# Altium PCB 10515.0502_CVSP1_2020（2拼版）2020.1019.PcbDoc (part 1 of 3)
Units mm, origin at the board's own origin, x right, y up, seen from the top; angles counter-clockwise.
Board outline 162.18 x 163.99 mm, 2 copper layers (Top Layer, Bottom Layer); 124 components, 0 nets, 386 pads, 70 vias.
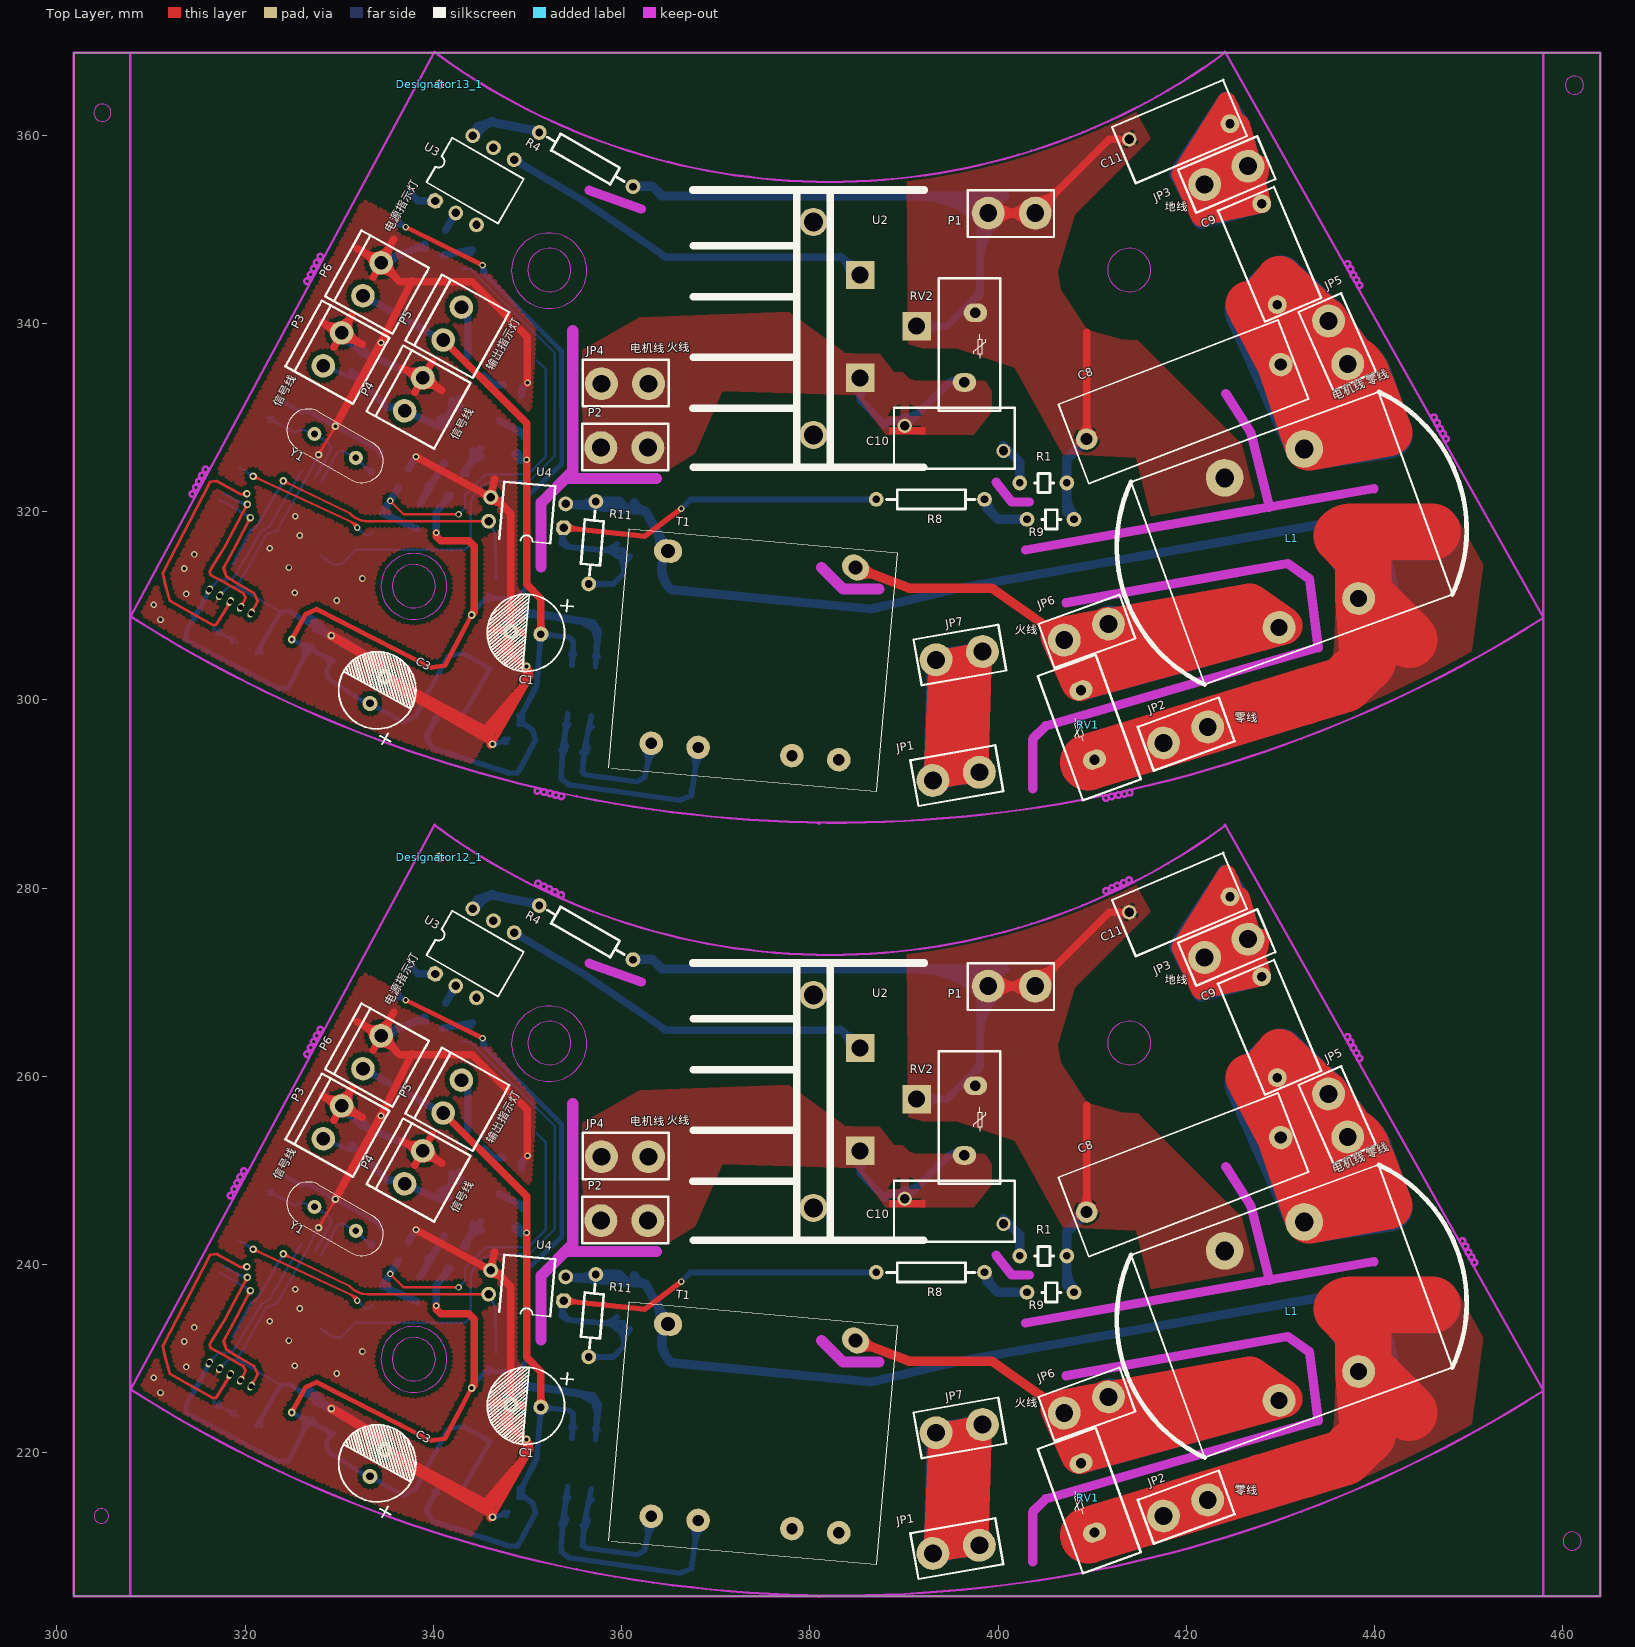
[diagram p0: Top Layer view]
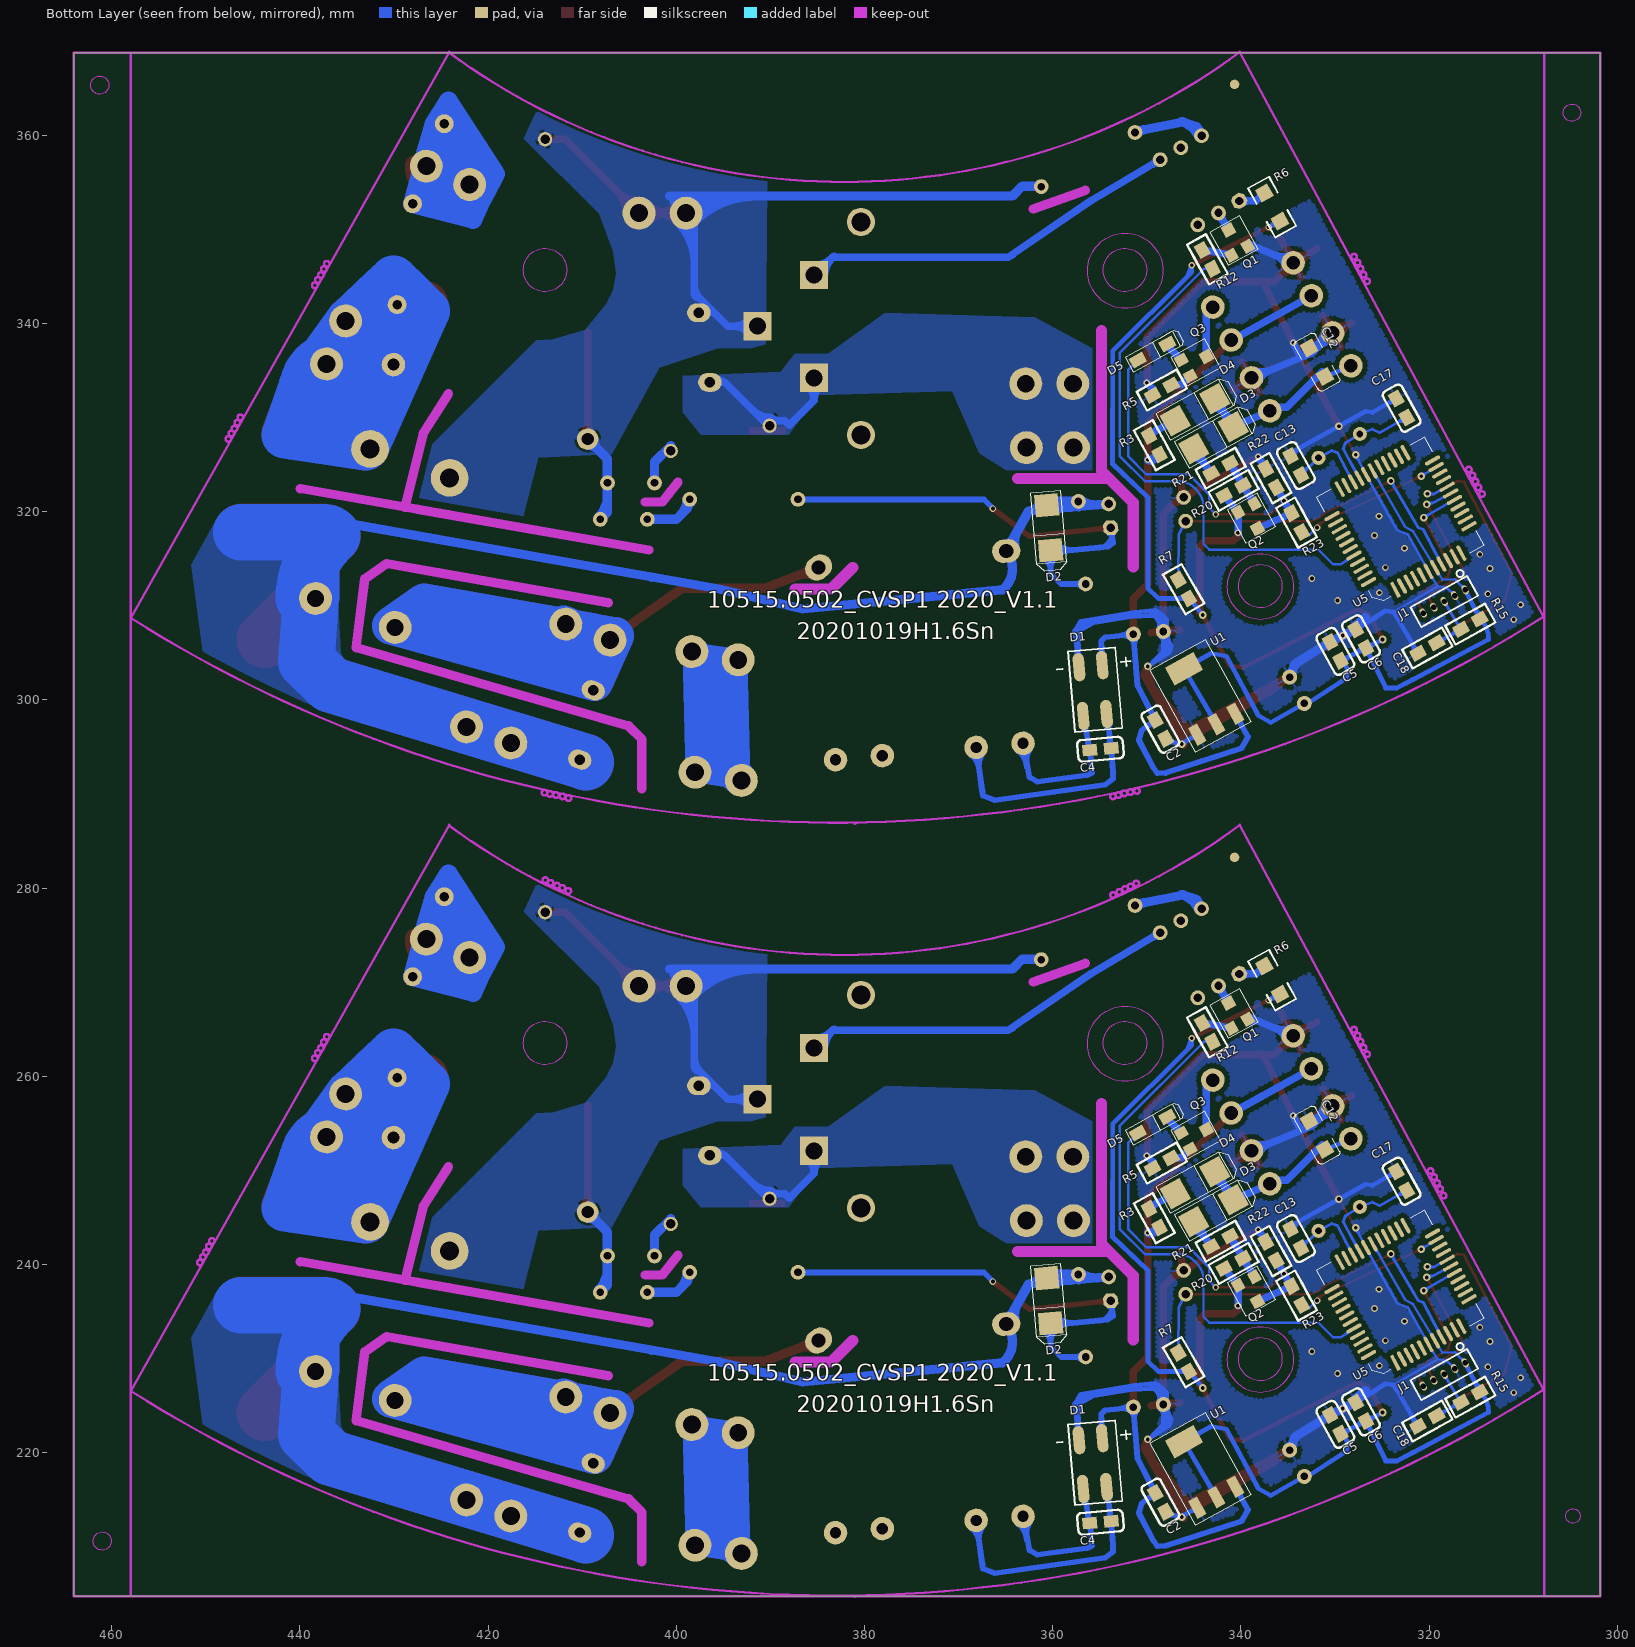
[diagram p1: Bottom Layer view, seen from below]

## Layer stack, top to bottom
Top Layer: signal copper 0.0356
Dielectric: dielectric 0.32, FR-4, Dk 4.8
Bottom Layer: signal copper 0.0356

## Board outline
301.818,368.772 463.997,368.772 463.997,204.781 301.818,204.781 301.818,368.772

## Design rules (kind name [scope] priority, off if disabled: settings)
Clearance [All] p1: gap=0.254
PolygonConnect [All] p1: connectstyle=Relief reliefconductorwidth=0.254 reliefentries=4 polygonreliefangle="90 Angle"
RoutingVias [All] p1: holewidth=0.711 width=1.27 viastyle="Through Hole" minholewidth=0.711 minwidth=1.27 maxholewidth=0.711 maxwidth=1.27
SilkscreenOverComponentPads [All] p1: minsilkscreentomaskgap=0.254
SolderMaskExpansion [All] p1: expansion=0.102
Width [All] p1: maxlimit=0.254 minlimit=0.254 preferedwidth=0.254
27 further rules are at their usual default settings.

## Components (designator, comment, footprint, x,y, rotation, side; value= is the part's Value field where it differs from the comment)
C1 "Cap Pol1" CAP/3.2MM*12MM*8MM 351.434,224.856 r265 top
C1 "Cap Pol1" CAP/3.2MM*12MM*8MM 351.434,306.986 r265 top
C2 "Cap" 0805C 348.005,213.743 r331 bottom
C2 "Cap" 0805C 348.005,295.874 r331 bottom
C3 "Cap Pol1" CAP/3.2MM*12MM*8MM 333.273,217.49 r151 top
C3 "Cap Pol1" CAP/3.2MM*12MM*8MM 333.273,299.62 r151 top
C4 "X7R/0.1uF/50V/±10%/0805" 0805C 353.784,212.727 r265 bottom
C4 "X7R/0.1uF/50V/±10%/0805" 0805C 353.784,294.858 r265 bottom
C5 "0805/105/25V" 0805C 330.543,224.03 r151 bottom
C5 "0805/105/25V" 0805C 330.543,306.161 r151 bottom
C6 "X7R/0.1uF/50V/±10%/0805" 0805C 327.812,225.364 r151 bottom
C6 "X7R/0.1uF/50V/±10%/0805" 0805C 327.812,307.494 r151 bottom
C8 "0.47uf/275v" CAP/0.47U/250V 430.047,253.494 r201 top
C8 "0.47uf/275v" CAP/0.47U/250V 430.047,335.625 r201 top
C9 "2.2nf/250v" CAP/1KV#1 428.015,270.576 r203 top
C9 "2.2nf/250v" CAP/1KV#1 428.015,352.706 r203 top
C10 "Cap" CAP/1KV#2 390.086,246.988 r270 top
C10 "Cap" CAP/1KV#2 390.086,329.118 r270 top
C11 "2.2nf/250v" CAP/1KV#3 424.65,279.085 r113 top
C11 "2.2nf/250v" CAP/1KV#3 424.65,361.215 r113 top
C12 "Cap" CAP/SMT/1206C 332.788,255.253 r241 bottom (schematic designator R6)
C12 "Cap" CAP/SMT/1206C 332.788,337.383 r241 bottom (schematic designator R6)
C13 "Cap" 0805C 334.734,243.779 r151 bottom
C13 "Cap" 0805C 334.734,325.909 r151 bottom
C17 "Cap" 0805C 323.494,249.875 r151 bottom
C17 "Cap" 0805C 323.494,332.005 r151 bottom
C18 "0805/104/25V" 0805R 321.208,222.824 r61 bottom
C18 "0805/104/25V" 0805R 321.208,304.954 r61 bottom
D1 "Bridge2" MB6S(SMT-4) 356.768,216.156 r85 bottom
D1 "Bridge2" MB6S(SMT-4) 356.768,298.287 r85 bottom
D2 "IN4007" M7 360.642,238.572 r175 bottom
D2 "IN4007" M7 360.642,320.702 r175 bottom
D3 "M7" M7 345.013,244.553 r61 bottom (schematic designator D2)
D3 "M7" M7 345.013,326.683 r61 bottom (schematic designator D2)
D4 "M7" M7 346.988,247.528 r61 bottom (schematic designator D2)
D4 "M7" M7 346.988,329.658 r61 bottom (schematic designator D2)
D5 "1N4148/SOD-123" D/SMT/SOD-123 349.388,254.828 r331 bottom
D5 "1N4148/SOD-123" D/SMT/SOD-123 349.388,336.958 r331 bottom
Designator12_1 "Comment" Mark 340.68,283.267 r90 top
Designator13_1 "Comment" Mark 340.68,365.397 r90 top
J1 "CON5" CON_LCD3 316.192,229.555 r241 bottom
J1 "CON5" CON_LCD3 316.192,311.685 r241 bottom
JP1 "AC-220V" CON-1PIN 398.013,210.178 r280 top
JP1 "AC-220V" CON-1PIN 398.013,292.308 r280 top
JP2 "AC-220V" CON-1PIN 422.279,214.997 r290 top
JP2 "AC-220V" CON-1PIN 422.279,297.127 r290 top
JP3 "EARTH" CON-1PIN 426.555,274.576 r293 top
JP3 "EARTH" CON-1PIN 426.555,356.707 r293 top
JP4 "MOTO_A" CON-1PIN 362.864,251.462 r270 top
JP4 "MOTO_A" CON-1PIN 362.864,333.593 r270 top
JP5 "MOTO_B" CON-1PIN 435.127,258.13 r24 top
JP5 "MOTO_B" CON-1PIN 435.127,340.26 r24 top
JP6 "MOTO_A" CON-1PIN 411.738,225.928 r290 top
JP6 "MOTO_A" CON-1PIN 411.738,308.058 r290 top
JP7 "MOTO_A" CON-1PIN 398.343,222.994 r280 top (schematic designator JP1)
JP7 "MOTO_A" CON-1PIN 398.343,305.124 r280 top (schematic designator JP1)
L1 "10mh" L1 432.538,244.528 r110 top
L1 "10mh" L1 432.538,326.658 r110 top
P1 "Header 1" CON/1PIN 398.957,269.585 r90 top
P1 "Header 1" CON/1PIN 398.957,351.715 r90 top
P2 "Header 1" CON/1PIN 362.801,244.668 r270 top
P2 "Header 1" CON/1PIN 362.801,326.798 r270 top
P3 "Header 2" CON-4.0MM*2 330.259,256.86 r241 top locked
P3 "Header 2" CON-4.0MM*2 330.259,338.99 r241 top locked
P4 "Header 2" CON-4.0MM*2 338.888,252.078 r241 top
P4 "Header 2" CON-4.0MM*2 338.888,334.208 r241 top
P5 "Header 2" CON-4.0MM*2 342.988,259.603 r241 top
P5 "Header 2" CON-4.0MM*2 342.988,341.733 r241 top
P6 "Header 2" CON-4.0MM*2 334.463,264.303 r241 top
P6 "Header 2" CON-4.0MM*2 334.463,346.433 r241 top
Q1 "NPN_SS8050" BJT/SMT/SOT-23 340.988,265.103 r151 bottom
Q1 "NPN_SS8050" BJT/SMT/SOT-23 340.988,347.233 r151 bottom
Q2 "PNP_SS8550" BJT/SMT/SOT-23 338.588,238.728 r331 bottom (schematic designator Q1)
Q2 "PNP_SS8550" BJT/SMT/SOT-23 338.588,320.858 r331 bottom (schematic designator Q1)
Q3 "NPN_SS8050" BJT/SMT/SOT-23 346.338,254.003 r241 bottom
Q3 "NPN_SS8050" BJT/SMT/SOT-23 346.338,336.133 r241 bottom
R1 "RES" R(DIP/0.25W) 407.314,240.921 r270 top
R1 "RES" R(DIP/0.25W) 407.314,323.052 r270 top
R3 "Res1" 0805R 349.763,245.928 r151 bottom
R3 "Res1" 0805R 349.763,328.058 r151 bottom
R4 "200R/AXIAL0.4/0.5w" RDIP/0.4/0.5W 351.263,278.153 r60 top
R4 "200R/AXIAL0.4/0.5w" RDIP/0.4/0.5W 351.263,360.283 r60 top
R5 "Res1" 0805R 349.413,250.228 r61 bottom
R5 "Res1" 0805R 349.413,332.358 r61 bottom
R6 "Res1" 1206R 335.863,268.728 r61 bottom
R6 "Res1" 1206R 335.863,350.858 r61 bottom
R7 "0805/10K/1/8W" 0805R 346.672,230.634 r150 bottom
R7 "0805/10K/1/8W" 0805R 346.672,312.765 r150 bottom
R8 "47K/axial0.4/1W" RDIP/0.4/0.5W 398.563,239.178 r270 top
R8 "47K/axial0.4/1W" RDIP/0.4/0.5W 398.563,321.308 r270 top
R9 "47K/axial0.4/1W" R(DIP/0.25W) 408.076,237.048 r270 top
R9 "47K/axial0.4/1W" R(DIP/0.25W) 408.076,319.178 r270 top
R11 "10K/axial0.3/0.25W" R[DIP/0.3/0.25W] 357.276,238.953 r355 top
R11 "10K/axial0.3/0.25W" R[DIP/0.3/0.25W] 357.276,321.083 r355 top
R12 "Res1" 0805R 343.013,263.678 r331 bottom
R12 "Res1" 0805R 343.013,345.808 r331 bottom
R15 "Res1" 0805R 316.636,225.364 r61 bottom
R15 "Res1" 0805R 316.636,307.494 r61 bottom
R20 "Res2" 0805R 339.788,240.678 r241 bottom (schematic designator R12)
R20 "Res2" 0805R 339.788,322.808 r241 bottom (schematic designator R12)
R21 "Res2" 0805R 343.163,241.928 r61 bottom (schematic designator R12)
R21 "Res2" 0805R 343.163,324.058 r61 bottom (schematic designator R12)
R22 "Res2" 0805R 337.363,242.428 r151 bottom (schematic designator R12)
R22 "Res2" 0805R 337.363,324.558 r151 bottom (schematic designator R12)
R23 "Res2" 0805R 333.538,235.703 r331 bottom (schematic designator R12)
R23 "Res2" 0805R 333.538,317.833 r331 bottom (schematic designator R12)
RV1 "471D14" RES/RY/TDK471KD14 409.538,215.203 r110 top
RV1 "471D14" RES/RY/TDK471KD14 409.538,297.333 r110 top
RV2 "471D14" RES/RY/TDK471KD14 397.013,255.303 r270 top
RV2 "471D14" RES/RY/TDK471KD14 397.013,337.433 r270 top
T1 "Trans3 Ideal" TRANS1 373.088,224.411 r355 top locked
T1 "Trans3 Ideal" TRANS1 373.088,306.542 r355 top locked
U1 "SPX1117M3-L-3-3/TR" SOT-223 344.64,214.188 r151 bottom
U1 "SPX1117M3-L-3-3/TR" SOT-223 344.64,296.318 r151 bottom
U2 "BT136-600D" BTA41_800B 385.057,257.571 r90 top
U2 "BT136-600D" BTA41_800B 385.057,339.701 r90 top
U3 "EL3051" MOC3052(DIP-6) 340.188,270.878 r330 top
U3 "EL3051" MOC3052(DIP-6) 340.188,353.008 r330 top
U4 "PC817" PC817(DIP-4) 353.847,236.159 r85 top
U4 "PC817" PC817(DIP-4) 353.847,318.289 r85 top
U5 "PIC16LF1937" TQFP44 323.05,236.857 r61 bottom locked
U5 "PIC16LF1937" TQFP44 323.05,318.988 r61 bottom locked
Y1 "4MHZ" Y1(DIP-5.08MM) 327.368,246.128 r240 top locked
Y1 "4MHZ" Y1(DIP-5.08MM) 327.368,328.259 r240 top locked

## Footprints (in the part's own frame and the unit in brackets; to place one, negate y for a bottom-side part, rotate by r counter-clockwise, add the part's x,y. Pads: shape width x height; smd on the part's side, far side on the other; paste and mask are expansions set on the pad)
0805C [mil]
  rect 50x60 smd: 1(0,0) 2(0,-90)
  silkscreen extent -45,-140 45,50
0805R [mil]
  rect 50x60 smd: 1(0,0) 2(0,-90)
  silkscreen extent -45,-140 45,50
1206R [mm]
  rect 1.5x1.5 smd: 1(0,0) 2(3.429,0)
  silkscreen extent -1.27,-1.27 4.7,1.27
BJT/SMT/SOT-23 [mm] "transistor 1base 2emitter 3collector"
  rect 1.143x1.27 smd: 1(0,0) 2(1.95,0)
  rect 1.27x1.27 smd: 3(1,2.5)
  silkscreen extent -0.78,-0.8 2.78,3.26, body extent -1.24,-1.1 3.22,3.3, height 1.2
BTA41_800B [mm]
  rect 3x3 hole 1.8: 1(-5.488,-0.3) 2(0,-6.3) 3(5.45,-0.3)
  round 3 hole 2: 4(-11.553,4.675) 5(11.073,4.675)
  silkscreen extent -14.99,-7.12 14.47,17.5
CAP/0.47U/250V [mm]
  round 2.5 hole 1.3: 1(0,0)
  round 2.286 hole 1.3: 2(22.1,0)
  silkscreen extent -1.43,-4.53 23.57,4.47
CAP/1KV#1 [mm]
  round 2 hole 1: 1(0,0) 2(2.667,10.5)
  silkscreen extent -1.9,-1.14 4.57,11.68
CAP/1KV#2 [mm]
  round 1.524 hole 1: 1(0,0) 2(2.667,10.5)
  silkscreen extent -1.91,-1.14 4.57,11.68
CAP/1KV#3 [mm]
  round 2 hole 1: 1(0,0)
  round 1.524 hole 1: 2(2.667,10.5)
  silkscreen extent -1.9,-1.14 4.57,11.68
CAP/3.2MM*12MM*8MM [mm]
  round 1.6 hole 0.8: 1(0,0) 2(0,-3.2)
  silkscreen extent -4.1,-5.7 4.1,3.13
CAP/SMT/1206C [mm]
  rect 1.5x1.5 smd: 1(0.026,0.025) 2(3.455,0.025)
  silkscreen extent -1.25,-1.24 4.73,1.3, body extent -1.14,-2.67 4.58,2.69, height 0.95
CON-1PIN [mm]
  round 3.5 hole 1.9: 1(0,0) 2(0,-5)
  silkscreen extent -2.54,-6.98 2.41,2.16
CON-4.0MM*2 [mm]
  round 2.5 hole 1.45: 1(0,0) 2(4,0)
  silkscreen extent -2,-3.5 6,4.7
CON/1PIN [mm]
  round 3.5 hole 1.9: 1(0,0) 2(0,-5)
  silkscreen extent -2.54,-6.98 2.41,2.16
CON_LCD3 [mm]
  oval 1x0.6 hole 0.58: 1(0,0) 2(0,-1.27) 3(0,-2.54) 4(0,-3.81) 5(0,-5.08)
  silkscreen extent -2.15,-5.98 1.2,0.9
D/SMT/SOD-123 [mm]
  rect 1.6x1.2 smd: 1(-1.8,0) 2(1.8,0)
  silkscreen extent -3.43,-0.9 2.78,0.9, body extent -2.24,-2 2.13,2.07, height 1.2
L1 [mm]
  round 3.5 hole 1.8: 1(-16.905,9) 2(-16.905,0)
  round 4 hole 2: 3(0,0) 4(0,9)
  silkscreen extent -19.91,-14.24 3,23.24
M7 [mm]
  rect 2.54x2.4 smd: 1(0,0) 2(0,-4.8)
  silkscreen extent -1.6,-6.99 1.6,1.4
Mark [mm] "mark"
  round 1 all layers, no hole: 0(0,0)
  round 3 on Top Solder: 0(0,0)
  round 3 on Bottom Solder: 0(0,0)
MB6S(SMT-4) [mm]
  oval 3x1.2 smd: 1(0,0) 2(0,-2.5) 3(5.2,-2.5) 4(5.2,0)
  silkscreen extent -1.62,-5.55 6.99,2.35
MOC3052(DIP-6) [mil]
  oct 62x62 hole 35: 1(0,0)
  round 62 hole 35: 2(100,0) 3(200,0) 4(200,314.96) 5(100,314.96) 6(0,314.96)
  silkscreen extent -70,50 275,265
PC817(DIP-4) [mil]
  oct 62x62 hole 35: 1(0,0)
  round 62 hole 35: 2(100,0) 3(100,314.96) 4(0,314.96)
  silkscreen extent -70,50 170,265
R(DIP/0.25W) [mil]
  round 62 hole 32: 1(0,0) 2(0,-196.85)
  silkscreen extent -40,-135 40,-55
R[DIP/0.3/0.25W] [mil]
  round 62 hole 32: 1(0,0) 2(0,-346.46)
  silkscreen extent -40,-310 40,-40
RDIP/0.4/0.5W [mil]
  round 62 hole 32: 1(0,0) 2(0,-452.76)
  silkscreen extent -40,-410 40,-40
RES/RY/TDK471KD14 [mm]
  oval 2x2.5 hole 1.1: 1(-3.7,0.584) 2(3.701,-0.583)
  silkscreen extent -7.35,-3.33 6.7,3.23
SOT-223 [mm]
  rect 1.1x2.15 smd: 1(0,0) 2(2.3,0) 3(4.6,0)
  rect 3.5x2.15 smd: 4(2.15,6.8)
  silkscreen extent -1.05,-1.58 5.65,8.37
TQFP44 [mm]
  rect 1.8x0.4 smd: 1(-6.1,4)
  oval 1.8x0.4 smd: 2(-6.1,3.2) 3(-6.1,2.4) 4(-6.1,1.6) 5(-6.1,0.8) 6(-6.1,0) 7(-6.1,-0.8) 8(-6.1,-1.6) 9(-6.1,-2.4) 10(-6.1,-3.2) 11(-6.1,-4) 23(6.1,-4) 24(6.1,-3.2) 25(6.1,-2.4) 26(6.1,-1.6) 27(6.1,-0.8) 28(6.1,0) 29(6.1,0.8) 30(6.1,1.6) 31(6.1,2.4) 32(6.1,3.2) 33(6.1,4)
  oval 0.4x1.8 smd: 12(-4,-6.1) 13(-3.2,-6.1) 14(-2.4,-6.1) 15(-1.6,-6.1) 16(-0.8,-6.1) 17(0,-6.1) 18(0.8,-6.1) 19(1.6,-6.1) 20(2.4,-6.1) 21(3.2,-6.1) 22(4,-6.1) 34(4,6.1) 35(3.2,6.1) 36(2.4,6.1) 37(1.6,6.1) 38(0.8,6.1) 39(0,6.1) 40(-0.8,6.1) 41(-1.6,6.1) 42(-2.4,6.1) 43(-3.2,6.1) 44(-4,6.1)
  silkscreen extent -6.55,-6.55 6.55,6.55
TRANS1 [mm]
  oval 3x2.5 hole 1.5 rot 145: 1(11.081,8.521)
  oval 3x2.5 hole 1.5: 2(-8.919,8.52)
  round 2.5 hole 1.2: 3(-8.919,-11.98) 4(-3.919,-11.98) 5(6.081,-11.98) 6(11.081,-11.98)
  silkscreen extent -13.21,-14.98 15.39,10.52
Y1(DIP-5.08MM) [mm]
  round 1.5 hole 0.711: 1(0,0) 2(0,5.08)
  silkscreen extent -2.27,-3.02 2.27,8.1

## Part data
C1 C1 C3 C3: "Polarized Capacitor (Radial)"
C2 C2 C10 C10 C12 C12 C13 C13 C17 C17: "Capacitor"
C4 C4 C5 C5 C6 C6 C18 C18: library part Cap, "Capacitor"
C8 C8 C9 C9 C11 C11: library part CAP, "Capacitor"
D1 D1: "Diode Bridge"
D2 D2: library part DIODE, "Diode"
D3 D3 D4 D4: library part "Diode 1N4007", "1 Amp General Purpose Rectifier"
D5 D5: library part D/D/SMT/1N4148/SOD-123, "VR=75V T(-65-175)P(0.5W)VF=0.6V"
J1 J1: "Connector"
JP1 JP1 JP2 JP2 JP3 JP3 JP4 JP4 JP5 JP5 JP6 JP6 JP7 JP7: library part "Header 2", "Header, 2-Pin"
L1 L1: library part INDUCTANCE
P1 P1 P2 P2 P3 P3 P4 P4 P5 P5 P6 P6: "Header, 2-Pin"
Q1 Q1 Q3 Q3: library part BJT/NPN/SMT/SS8050/SOT-23
Q2 Q2: library part BJT/PNP/SMT/SS8550/SOT-23, "Vce25V/Vcb40V/Veb5V/Ic1.5V/Pd300mW"
R1 R1: library part Res1, "Resistor"
R3 R3 R5 R5 R6 R6 R12 R12 R15 R15 R20 R20 R21 R21 R22 R22 R23 R23: "Resistor"
R4 R4 R7 R7 R8 R8 R9 R9 R11 R11: library part RES2
RV1 RV1 RV2 RV2: library part "Res Varistor", "Varistor (Voltage-Sensitive Resistor)"
T1 T1: "Three-winding Transformer (Ideal)"
U1 U1: library part SPX3117, "Voltage Regulator"
U2 U2: library part TRIAC
U3 U3: library part MOC3043
U4 U4: library part OPTOISO1, "Optoisolator"
U5 U5: "Flash-Based, 8-Bit CMOS Microcontroller with LCD Driver and nanoWatt Technology, 4K (x14-Bit words) Program Memory, 512 Bytes Data Memory, 35 I/O pins, 44-Pin TQFP, Standard VDD Range, Extended Temperature"
Y1 Y1: library part XTAL, "Crystal Oscillator"

## Free pads (board coordinates)
  round 1 on Top Overlay: 2(351.688,233.619) 2(351.688,315.749)

## Via types
v1: diameter 0.7, hole 0.4, Top Layer to Bottom Layer, tented both sides, 46 vias
v2: diameter 0.8, hole 0.4, Top Layer to Bottom Layer, tented both sides, 24 vias

## Nets (pads, with @x,y where several pads share a name; then routed paths per layer and width w, separated by ;. In a path a pad name is that pad's centre, name@x,y a point inside that pad or via, vN(x,y) a via of type N, cw(c..) or ccw(c..) an arc to the next point about the centre after c; other vN are vias at no path point)
pads on no net: C1.1 C1.2 C2.1 C2.2 C3.1 C3.2 C4.1 C4.2 C5.1 C5.2 C6.1 C6.2 C8.1 C8.2 C9.1 C9.2 C10.1 C10.2 C11.1 C11.2 C12.1 C12.2 C13.1 C13.2 C17.1 C17.2 C18.1 C18.2 D1.1 D1.2 D1.3 D1.4 D2.1 D2.2 D3.1 D3.2 D4.1 D4.2 D5.1 D5.2 Designator12_1.0 Designator13_1.0 J1.1 J1.2 J1.3 J1.4 J1.5 JP1.1 JP1.2 JP2.1 JP2.2 JP3.1 JP3.2 JP4.1 JP4.2 JP5.1 JP5.2 JP6.1 JP6.2 JP7.1 JP7.2 L1.1 L1.2 L1.3 L1.4 P1.1 P1.2 P2.1 P2.2 P3.1 P3.2 P4.1 P4.2 P5.1 P5.2 P6.1 P6.2 Q1.1 Q1.2 Q1.3 Q2.1 Q2.2 Q2.3 Q3.1 Q3.2 Q3.3 R1.1 R1.2 R3.1 R3.2 R4.1 R4.2 R5.1 R5.2 R6.1 R6.2 R7.1 R7.2 R8.1 R8.2 R9.1 R9.2 R11.1 R11.2 R12.1 R12.2 R15.1 R15.2 R20.1 R20.2 R21.1 R21.2 R22.1 R22.2 R23.1 R23.2 RV1.1 RV1.2 RV2.1 RV2.2 T1.1 T1.2 T1.3 T1.4 T1.5 T1.6 U1.1 U1.2 U1.3 U1.4 U2.1 U2.2 U2.3 U2.4 U2.5 U3.1 U3.2 U3.3 U3.4 U3.5 U3.6 U4.1 U4.2 U4.3 U4.4 U5.1 U5.2 U5.3 U5.4 U5.5 U5.6 U5.7 U5.8 U5.9 U5.10 U5.11 U5.12 U5.13 U5.14 U5.15 U5.16 U5.17 U5.18 U5.19 U5.20 U5.21 U5.22 U5.23 U5.24 U5.25 U5.26 U5.27 U5.28 U5.29 U5.30 U5.31 U5.32 U5.33 U5.34 U5.35 U5.36 U5.37 U5.38 U5.39 U5.40 U5.41 U5.42 U5.43 U5.44 Y1.1 Y1.2